# EAGLE board PROIECTUL TUL (EAGLE 9.7.0)
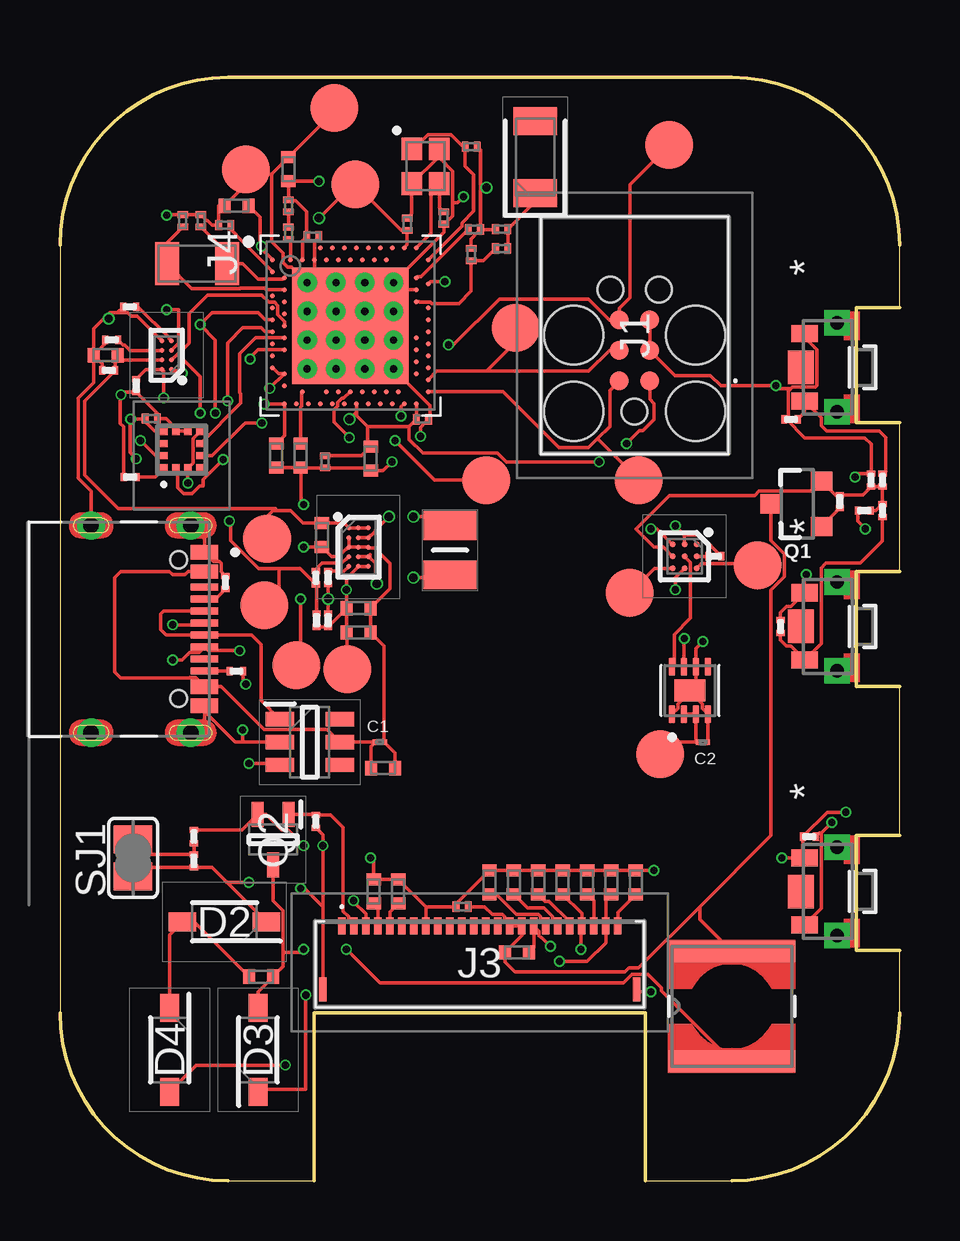
[diagram p0: board, top side]
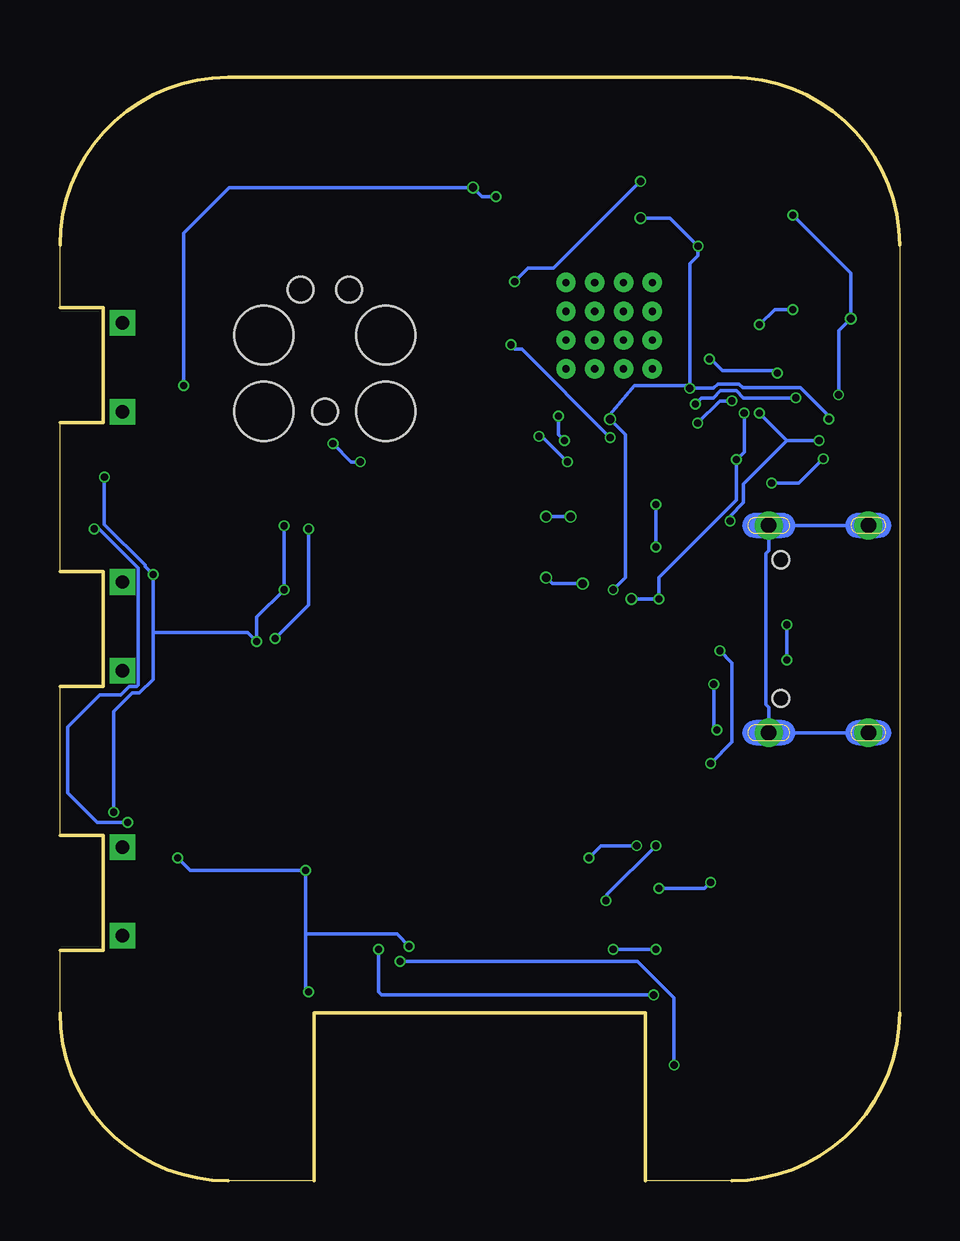
[diagram p1: board, bottom side, seen from below]

Size 35 x 46 mm. Coordinates in mm from the lower left corner, seen from the top.
Outline: 7,0 10.6,0 10.6,7 24.4,7 24.4,0 28,0 arc90 35,7 35,9.6 33.2,9.6 33.2,14.4 35,14.4 35,20.6 33.2,20.6 33.2,25.4 35,25.4 35,31.6 33.2,31.6 33.2,36.4 35,36.4 35,39 arc90 28,46 7,46 arc90 0,39 0,7 arc90 7,0
Copper layers (1*16): Top 0.035mm / dielectric 1.6mm / Bottom 0.035mm
Design rules "jlcpcb-2layers.dru": minimum track width 0.15mm, minimum drill 0.3mm, track to track 5mil, track to pad 0.05mm, pad to pad 5mil, via to via 5mil, smd to smd 5mil, copper to edge 0.2mm, drill to drill 0.1mm, minimum pad ring 10mil, minimum via ring 3mil, stop-mask expansion 4mil, vias tented up to drill 0mil, thermal gap 10mil

## Footprints (pad centres in the part's own frame; a part is rotated, then mirrored left to right if it is on the bottom)
2450AT18B100E_ANTC3216X140N = smd 1.15 x 1.8: 1 -1.5,0; 2 1.5,0
GRM011R60J152KE01L_2_CAPC0201X13N = smd 0.22 x 0.23: 1 -0.185,0; 2 0.185,0
GRM011R60J152KE01L_1_0201 = smd 0.35 x 0.25: 1 0,0.275; 2 0,-0.275
NORDIC_NRF_3_RESC0402_L = smd 0.5 x 0.6: 1 -0.5,0; 2 0.5,0
ESP32_C6_LIBRARY_3_SOT95P280X145-6N = smd 1.2 x 0.6: 1 -1.25,0.95; 2 -1.25,0; 3 -1.25,-0.95; 4 1.25,-0.95; 5 1.25,0; 6 1.25,0.95
ESP32_C6_LIBRARY_5_SOD3716X135N = smd 1.15 x 0.8: 1 -1.75,0; 2 1.75,0
NORDIC_NRF_3_RESC0201_L = smd 0.28 x 0.43: 1 -0.255,0; 2 0.255,0
RT6160AWSC_BGA15C40P3X5_140X230X60 = smd 0.216 x 0.216: A1 -0.4,0.8; A2 0,0.8; A3 0.4,0.8; B1 -0.4,0.4; B2 0,0.4; B3 0.4,0.4; C1 -0.4,0; C2 0,0; C3 0.4,0; D1 -0.4,-0.4; D2 0,-0.4; D3 0.4,-0.4; E1 -0.4,-0.8; E2 0,-0.8; E3 0.4,-0.8
DRV2605YZFR_BGA9C50P3X3_144X144X62 = smd 0.25 x 0.25: A1 -0.5,0.5; A2 0,0.5; A3 0.5,0.5; B1 -0.5,0; B2 0,0; B3 0.5,0; C1 -0.5,-0.5; C2 0,-0.5; C3 0.5,-0.5
BQ25180YBGR_BGA8C40P2X4_100X155X50 = smd 0.2 x 0.2: A1 -0.2,0.6; A2 0.2,0.6; B1 -0.2,0.2; B2 0.2,0.2; C1 -0.2,-0.2; C2 0.2,-0.2; D1 -0.2,-0.6; D2 0.2,-0.6
BMA423_BMA423 = smd 0.3 x 0.35: 1 -0.75,-0.775; 2 -0.25,-0.775; 3 0.25,-0.775; 4 0.75,-0.775; 7 0.75,0.775; 8 0.25,0.775; 9 -0.25,0.775; 10 -0.75,0.775 | smd 0.35 x 0.3: 5 0.775,-0.25; 6 0.775,0.25; 11 -0.775,0.25; 12 -0.775,-0.25
TC2030-IDC_TC2030IDC = smd 0.783 x 0.783: 1 -0.953,-0.635; 2 -0.953,0.635; 3 0.317,-0.635; 4 0.317,0.635; 5 1.588,-0.635; 6 1.588,0.635 | hole 2.451: -2.223,-2.54; -2.223,2.54; 0.952,-2.54; 0.952,2.54 | hole 1.067: -2.223,0; 2.857,-1.016; 2.857,1.016
503480-2400_5034802400 = smd 0.3 x 0.7: 1 -5.75,1.525; 2 -5.25,1.525; 3 -4.75,1.525; 4 -4.25,1.525; 5 -3.75,1.525; 6 -3.25,1.525; 7 -2.75,1.525; 8 -2.25,1.525; 9 -1.75,1.525; 10 -1.25,1.525; 11 -0.75,1.525; 12 -0.25,1.525; 13 0.25,1.525; 14 0.75,1.525; 15 1.25,1.525; 16 1.75,1.525; 17 2.25,1.525; 18 2.75,1.525; 19 3.25,1.525; 20 3.75,1.525; 21 4.25,1.525; 22 4.75,1.525; 23 5.25,1.525; 24 5.75,1.525 | smd 0.3 x 1: MP1 -6.54,-1.125; MP2 6.54,-1.125
KH-TYPE-C-16P_KINGHELM_KH-TYPE-C-16P = smd 0.6 x 1.15: A1_B12 -3.2,4.725; A4_B9 -2.4,4.725; A9_B4 2.4,4.725; A12_B1 3.2,4.725 | smd 0.3 x 1.15: A5 -1.25,4.725; A6 -0.25,4.725; A7 0.25,4.725; A8 1.25,4.725; B5 1.75,4.725; B6 0.75,4.725; B7 -0.75,4.725; B8 -1.75,4.725 | drill 0.65 pad 1.05: SH1 -4.32,0; SH2 4.32,0; SH3 -4.32,4.15; SH4 4.32,4.15 | hole 0.7: -2.89,3.65; 2.89,3.65
MLP2016SR47MT0S1_INDC2016X100N = smd 1.2 x 2.2: 1 -1.028,0; 2 1.028,0
ESP32_C6_LIBRARY_2_IND_4828-WE-TPC_WRE = smd 0.9 x 5.3: 1 -2.286,0; 2 2.286,0
ESP32_C6_LIBRARY_4_ESP32_C6_LIBRARY_4_ESP32_C6_LIBRARY_4_ESP32_C6_LIBRARY_4_ESP32_WROVER_SPARKFUN-DISCRETESEMI_SOT23-3 = smd 0.8 x 0.9: 1 -0.95,-1; 2 0.95,-1; 3 0,1.1
ESP32_C6_LIBRARY_6_SOT65P210X110-3N = smd 1.05 x 0.5: 1 -1.05,0.65; 2 -1.05,-0.65; 3 1.05,0
ERA-1AEB3401C_0201 = smd 0.35 x 0.25: 1 0,0.275; 2 0,-0.275
CPF0201D7K68C1_0201 = smd 0.35 x 0.25: 1 0,0.275; 2 0,-0.275
ESP32_C6_LIBRARY_7_JUMPER_SJ = smd 1.168 x 1.6: 1 -0.762,0; 2 0.762,0
2025-10-22_07-23-44_LIBRARY_SW_EVP-AKE31A_PAN = smd 0.711 x 1.092: 1 -1.4,-0.972; 2 1.4,-0.972 | drill 0.559 pad 0.914 square: 3 -1.848,0.381; 4 1.848,0.381 | smd 1.397 x 1.092: 5 0,-1.124
HECTOR_WATCH_1_TP20R = smd 2 x 2: TP 0,0
ESP32_C6_LIBRARY_SON50P200X200X80-9N = smd 0.76 x 0.27: 1 -0.985,0.75; 2 -0.985,0.25; 3 -0.985,-0.25; 4 -0.985,-0.75; 5 0.985,-0.75; 6 0.985,-0.25; 7 0.985,0.25; 8 0.985,0.75 | smd 0.9 x 1.3: 9 0,0
NORDIC_NRF_4_AQFN50P700X700X85_HS-74N = smd 4.85 x 4.85: P$74 0,0 | drill 0.3 pad 0.6: P$75 -1.8,1.8; P$76 -0.6,1.8; P$77 0.6,1.8; P$78 1.8,1.8; P$79 -1.8,0.6; P$80 -0.6,0.6; P$81 0.6,0.6; P$82 1.8,0.6; P$83 -1.8,-0.6; P$84 -0.6,-0.6; P$85 0.6,-0.6; P$86 1.8,-0.6; P$87 -1.8,-1.8; P$88 -0.6,-1.8; P$89 0.6,-1.8; P$90 1.8,-1.8 | smd 0.2 x 0.2: P$A8 -1.25,3.25; P$A10 -0.75,3.25; P$A12 -0.25,3.25; P$A14 0.25,3.25; P$A16 0.75,3.25; P$A18 1.25,3.25; P$A20 1.75,3.25; P$A22 2.25,3.25; P$A23 2.75,3.25; P$AA24 3.25,-2.25; P$AB2 -2.75,-2.5; P$AC5 -2,-2.75; P$AC9 -1,-2.75; P$AC11 -0.5,-2.75; P$AC13 0,-2.75; P$AC15 0.5,-2.75; P$AC17 1,-2.75; P$AC19 1.5,-2.75; P$AC21 2,-2.75; P$AC24 3.25,-2.75; P$AD2 -2.75,-3.25; P$AD4 -2.25,-3.25; P$AD6 -1.75,-3.25; P$AD8 -1.25,-3.25; P$AD10 -0.75,-3.25; P$AD12 -0.25,-3.25; P$AD14 0.25,-3.25; P$AD16 0.75,-3.25; P$AD18 1.25,-3.25; P$AD20 1.75,-3.25; P$AD22 2.25,-3.25; P$AD23 2.75,-3.25; P$B1 -3.25,2.75; P$B3 -2.5,2.75; P$B5 -2,2.75; P$B7 -1.5,2.75; P$B9 -1,2.75; P$B11 -0.5,2.75; P$B13 0,2.75; P$B15 0.5,2.75; P$B17 1,2.75; P$B19 1.5,2.75; P$B24 3.25,2.75; P$C1 -3.25,2.25; P$D2 -2.75,2; P$D23 2.75,2; P$E24 3.25,1.75; P$F2 -2.75,1.5; P$F23 2.75,1.5; P$G1 -3.25,1.25; P$H2 -2.75,1; P$H23 2.75,1; P$J1 -3.25,0.75; P$J24 3.25,0.75; P$K2 -2.75,0.5; P$L1 -3.25,0.25; P$L24 3.25,0.25; P$M2 -2.75,0; P$N1 -3.25,-0.25; P$N24 3.25,-0.25; P$P2 -2.75,-0.5; P$P23 2.75,-0.5; P$R1 -3.25,-0.75; P$R24 3.25,-0.75; P$T2 -2.75,-1; P$T23 2.75,-1; P$U1 -3.25,-1.25; P$U24 3.25,-1.25; P$V23 2.75,-1.5; P$W1 -3.25,-1.75; P$W24 3.25,-1.75; P$Y2 -2.75,-2; P$Y23 2.75,-2
RESC0201_L = smd 0.28 x 0.43: 1 -0.255,0; 2 0.255,0
NORDIC_NRF_1_XTAL_3215_N = smd 1 x 1.8: 1 -1.25,0; 2 1.25,0
NORDIC_NRF_2_RESC0201_L = smd 0.28 x 0.43: 1 -0.255,0; 2 0.255,0
NORDIC_NRF_BT-XTAL_2016_N = smd 0.95 x 0.85: 1 -0.725,-0.575; 2 0.725,-0.575; 3 0.725,0.575; 4 -0.725,0.575

## Placement (x,y rotation side)
ANT1  2450AT18B100E_2450AT18B100E  [2450AT18B100E_ANTC3216X140N]  19.81,42.67 90 top
C1  0.1uF  [GRM011R60J152KE01L_2_CAPC0201X13N]  13.34,18.29 0 top
C2  0.1uF  [GRM011R60J152KE01L_2_CAPC0201X13N]  26.8,18.29 180 top
C4  1uF  [GRM011R60J152KE01L_1_0201]  3.17,33.15 180 top
C5  1uF  [GRM011R60J152KE01L_1_0201]  2.16,35.05 90 top
C6  0.1uF  [GRM011R60J152KE01L_1_0201]  2.03,33.78 90 top
C7  1uF  [GRM011R60J152KE01L_1_0201]  27.3,26.04 270 top
C8  0.1uF  [GRM011R60J152KE01L_1_0201]  33.81,29.21 0 top
C9  1uF  [GRM011R60J152KE01L_1_0201]  30.04,23.11 0 top
C10  1uF  [GRM011R60J152KE01L_1_0201]  31.24,14.35 90 top
C11  1uF  [GRM011R60J152KE01L_1_0201]  30.48,31.75 90 top
C39  10uF  [NORDIC_NRF_3_RESC0402_L]  1.91,34.42 180 top
D1  ESP32_C6_LIBRARY_3_USBLC6-2SC6Y  [ESP32_C6_LIBRARY_3_SOT95P280X145-6N]  10.41,18.29 0 top
D2  MBR0530  [ESP32_C6_LIBRARY_5_SOD3716X135N]  6.86,10.79 180 top
D3  MBR0530  [ESP32_C6_LIBRARY_5_SOD3716X135N]  8.26,5.46 90 top
D4  MBR0530  [ESP32_C6_LIBRARY_5_SOD3716X135N]  4.57,5.46 270 top
EPD_C1  1uF/50V  [NORDIC_NRF_3_RESC0402_L]  14.1,12.06 270 top
EPD_C2  1uF/50V  [NORDIC_NRF_3_RESC0402_L]  13.08,12.06 270 top
EPD_C5  0.1uF/50V  [NORDIC_NRF_3_RESC0201_L]  16.76,11.43 0 top
EPD_C6  1uF/50V  [NORDIC_NRF_3_RESC0402_L]  17.91,12.45 270 top
EPD_C7  1uF/50V  [NORDIC_NRF_3_RESC0402_L]  18.92,12.45 270 top
EPD_C8  1uF/50V  [NORDIC_NRF_3_RESC0402_L]  19.94,12.45 270 top
EPD_C9  1uF/50V  [NORDIC_NRF_3_RESC0402_L]  20.95,12.45 270 top
EPD_C10  1uF/50V  [NORDIC_NRF_3_RESC0402_L]  21.97,12.45 270 top
EPD_C11  1uF/50V  [NORDIC_NRF_3_RESC0402_L]  22.99,12.45 270 top
EPD_C12  1uF/50V  [NORDIC_NRF_3_RESC0402_L]  24,12.45 270 top
IC1  RT6160AWSC  [RT6160AWSC_BGA15C40P3X5_140X230X60]  12.45,26.42 0 top
IC2  DRV2605YZFR_DRV2605YZFR  [DRV2605YZFR_BGA9C50P3X3_144X144X62]  26.04,26.04 270 top
IC3  BQ25180YBGR_BQ25180YBGR  [BQ25180YBGR_BGA8C40P2X4_100X155X50]  4.45,34.42 180 top
IC4  BMA423_BMA423  [BMA423_BMA423]  5.08,30.48 0 top
J1  TC2030-IDC_TC2030-IDC  [TC2030-IDC_TC2030IDC]  23.96,34.3 90 top
J3  503480-2400_503480-2400  [503480-2400_5034802400]  17.5,9.1 0 top
J4  KH-TYPE-C-16P_KH-TYPE-C-16P  [KH-TYPE-C-16P_KINGHELM_KH-TYPE-C-16P]  1.3,23 270 top
L1  MLP2016SR47MT0S1_FTC252012SR47MBCA  [MLP2016SR47MT0S1_INDC2016X100N]  16.26,26.29 270 top
L2  68uH  [ESP32_C6_LIBRARY_2_IND_4828-WE-TPC_WRE]  28,7.27 90 top
Q1  20V/4.2A/52mΩ/1.4W  [ESP32_C6_LIBRARY_4_ESP32_C6_LIBRARY_4_ESP32_C6_LIBRARY_4_ESP32_C6_LIBRARY_4_ESP32_WROVER_SPARKFUN-DISCRETESEMI_SOT23-3]  30.74,28.22 90 top
Q2  SI1308EDL-T1-GE3  [ESP32_C6_LIBRARY_6_SOT65P210X110-3N]  8.89,14.22 270 top
R1  10k  [ERA-1AEB3401C_0201]  34.29,29.21 0 top
R2  10k  [CPF0201D7K68C1_0201]  33.53,27.94 90 top
R3  10k  [ERA-1AEB3401C_0201]  34.29,27.94 180 top
R4  10k  [ERA-1AEB3401C_0201]  2.9,36.43 90 top
R5  0  [CPF0201D7K68C1_0201]  10.67,25.14 0 top
R6  0  [ERA-1AEB3401C_0201]  11.18,25.15 0 top
R7  3k3  [ERA-1AEB3401C_0201]  11.18,23.37 180 top
R8  3k3  [ERA-1AEB3401C_0201]  10.7,23.37 180 top
R9  0  [ERA-1AEB3401C_0201]  2.92,29.34 270 top
R10  0.47  [ERA-1AEB3401C_0201]  5.59,14.35 180 top
R11  2.2  [ERA-1AEB3401C_0201]  5.59,13.34 180 top
R12  10k  [ERA-1AEB3401C_0201]  10.67,14.99 180 top
R13  5k1  [ERA-1AEB3401C_0201]  7.36,21.25 90 top
R14  5k1  [ERA-1AEB3401C_0201]  6.9,24.94 0 top
R_PWR_EPD  10k  [ERA-1AEB3401C_0201]  32.51,28.32 180 top
SJ1  [ESP32_C6_LIBRARY_7_JUMPER_SJ]  3.05,13.46 90 top
SW1  2025-10-22_07-23-44_LIBRARY_EVP-AKE31ASW_EVP-AKE31A_PAN  [2025-10-22_07-23-44_LIBRARY_SW_EVP-AKE31A_PAN]  32.01,33.91 270 top
SW2  2025-10-22_07-23-44_LIBRARY_EVP-AKE31ASW_EVP-AKE31A_PAN  [2025-10-22_07-23-44_LIBRARY_SW_EVP-AKE31A_PAN]  32.01,12.06 270 top
SW3  2025-10-22_07-23-44_LIBRARY_EVP-AKE31ASW_EVP-AKE31A_PAN  [2025-10-22_07-23-44_LIBRARY_SW_EVP-AKE31A_PAN]  32.01,23.11 270 top
TP_3.3V  HECTOR_WATCH_1_TPTP20R  [HECTOR_WATCH_1_TP20R]  12.32,41.53 0 top
TP_3V3  HECTOR_WATCH_1_TPTP20R  [HECTOR_WATCH_1_TP20R]  11.98,21.34 0 top
TP_BAT_GND  HECTOR_WATCH_1_TPTP20R  [HECTOR_WATCH_1_TP20R]  11.43,44.72 0 top
TP_GND  HECTOR_WATCH_1_TPTP20R  [HECTOR_WATCH_1_TP20R]  7.75,42.16 0 top
TP_ON  HECTOR_WATCH_1_TPTP20R  [HECTOR_WATCH_1_TP20R]  23.75,24.51 270 top
TP_OP  HECTOR_WATCH_1_TPTP20R  [HECTOR_WATCH_1_TP20R]  29.08,25.65 270 top
TP_RESET  HECTOR_WATCH_1_TPTP20R  [HECTOR_WATCH_1_TP20R]  25.4,43.18 270 top
TP_SCL  HECTOR_WATCH_1_TPTP20R  [HECTOR_WATCH_1_TP20R]  8.51,24 0 top
TP_SDA  HECTOR_WATCH_1_TPTP20R  [HECTOR_WATCH_1_TP20R]  9.85,21.5 0 top
TP_SWDCLK  HECTOR_WATCH_1_TPTP20R  [HECTOR_WATCH_1_TP20R]  18.99,35.56 0 top
TP_SWDIO  HECTOR_WATCH_1_TPTP20R  [HECTOR_WATCH_1_TP20R]  24.13,29.21 0 top
TP_SWO  HECTOR_WATCH_1_TPTP20R  [HECTOR_WATCH_1_TP20R]  17.78,29.21 0 top
TP_VBAT  HECTOR_WATCH_1_TPTP20R  [HECTOR_WATCH_1_TP20R]  25.02,17.78 270 top
TP_VREG  HECTOR_WATCH_1_TPTP20R  [HECTOR_WATCH_1_TP20R]  8.64,26.77 0 top
U1  ESP32_C6_LIBRARY_MAX17048G+T10  [ESP32_C6_LIBRARY_SON50P200X200X80-9N]  26.26,20.44 90 top
U$1  NORDIC_NRF_4_NRF52840_QF  [NORDIC_NRF_4_AQFN50P700X700X85_HS-74N]  12.11,35.65 0 top
U$2  100nF  [RESC0201_L]  6.87,39.84 0 top
U$4  100nF  [NORDIC_NRF_3_RESC0201_L]  11.05,29.97 270 top
U$5  12pF  [RESC0201_L]  5.12,40.02 270 top
U$6  12pF  [RESC0201_L]  5.88,40.02 270 top
U$8  47nF  [RESC0201_L]  10.54,39.37 180 top
U$10  100nF  [RESC0201_L]  14.48,39.88 270 top
U$11  [NORDIC_NRF_1_XTAL_3215_N]  5.71,38.23 0 top
U$12  [NORDIC_NRF_2_RESC0201_L]  18.41,38.86 0 top
U$13  1pF  [NORDIC_NRF_3_RESC0201_L]  17.14,38.61 90 top
U$15  32MHz  [NORDIC_NRF_BT-XTAL_2016_N]  15.24,42.29 270 top
U$16  12pF  [NORDIC_NRF_3_RESC0201_L]  16,40.13 270 top
U$17  12pF  [NORDIC_NRF_3_RESC0201_L]  17.14,43.11 0 top
U$18  100pF  [NORDIC_NRF_3_RESC0201_L]  17.27,39.66 180 top
U$19  10μH  [NORDIC_NRF_2_RESC0201_L]  9.53,39.5 90 top
U$20  15nH  [NORDIC_NRF_2_RESC0201_L]  9.53,40.64 90 top
U$21  1pF  [NORDIC_NRF_3_RESC0201_L]  18.41,39.67 180 top
U$22  100nF  [NORDIC_NRF_3_RESC0201_L]  15.11,31.75 0 top
U$23  4.7μF  [NORDIC_NRF_3_RESC0402_L]  9.02,30.23 270 top
U$24  4.7μF  [NORDIC_NRF_3_RESC0402_L]  12.95,30.1 270 top
U$25  4.7μF  [NORDIC_NRF_3_RESC0402_L]  7.37,40.64 0 top
U$26  1μF  [NORDIC_NRF_3_RESC0402_L]  9.53,42.16 90 top
U$27  4.7μF  [NORDIC_NRF_3_RESC0402_L]  10.03,30.23 270 top
U$28  10uF  [NORDIC_NRF_3_RESC0402_L]  10.92,26.92 90 top
U$29  22uF  [NORDIC_NRF_3_RESC0402_L]  12.45,22.86 0 top
U$30  22uF  [NORDIC_NRF_3_RESC0402_L]  12.45,23.88 0 top
U$31  100nF  [NORDIC_NRF_3_RESC0201_L]  3.81,31.77 0 top
U$34  4.7uF  [NORDIC_NRF_3_RESC0402_L]  13.46,17.2 0 top
U$36  10uF  [NORDIC_NRF_3_RESC0402_L]  19.05,9.53 0 top
U$37  4.7uF/25V  [NORDIC_NRF_3_RESC0402_L]  8.38,8.51 0 top

## Library data of the parts
ANT1 = InkTime_v5; ARROW_PART_NUMBER: 2450AT18B100E; ARROW_PRICE-STOCK: https://www.arrow.com/en/products/2450at18b100e/johanson-dielectrics?utm_currency=USD&region=nac; DESCRIPTION: Antennas 2.45GHz ANTENNA; HEIGHT: 1.4mm; MANUFACTURER_NAME: JOHANSON TECHNOLOGY; MANUFACTURER_PART_NUMBER: 2450AT18B100E; MOUSER_PART_NUMBER: 609-2450AT18B100E; MOUSER_PRICE-STOCK: https://www.mouser.co.uk/ProductDetail/Johanson-Technology/2450AT18B100E?qs=yCnrNFeXz%252Bh5MFsFIXGZGA%3D%3D
C1 C2 = InkTime_v5; AVAILABILITY: In Stock; CHECK_PRICES: https://www.snapeda.com/parts/GRM011R60J152KE01L/Murata/view-part/?ref=eda; DESCRIPTION: SMD Capacitor X5R(EIA) with Capacitance: 1500pF Tol. 10%. Rated Voltage: 6.3Vdc; MF: Murata; MP: GRM011R60J152KE01L; PACKAGE: 0201 Murata; PRICE: None; SNAPEDA_LINK: https://www.snapeda.com/parts/GRM011R60J152KE01L/Murata/view-part/?ref=snap
C4-C11 C39 EPD_C1 EPD_C2 EPD_C5-EPD_C12 R1-R14 R_PWR_EPD SJ1 TP_3.3V TP_3V3 TP_BAT_GND TP_GND TP_ON TP_OP TP_RESET TP_SCL TP_SDA TP_SWDCLK TP_SWDIO TP_SWO TP_VBAT TP_VREG U$1 U$4 U$11-U$13 U$15-U$31 U$34 U$36 U$37 = InkTime_v5
D1 = InkTime_v5; AVAILABILITY: In Stock; CHECK_PRICES: https://www.snapeda.com/parts/USBLC6-2SC6Y/STMicroelectronics/view-part/?ref=eda; DESCRIPTION: 17V Clamp 5A (8/20µs) Ipp Tvs Diode Surface Mount SOT-23-6; MF: STMicroelectronics; MP: USBLC6-2SC6Y; PACKAGE: SOT-23-6 STMicroelectronics; PRICE: None; SNAPEDA_LINK: https://www.snapeda.com/parts/USBLC6-2SC6Y/STMicroelectronics/view-part/?ref=snap
D2-D4 = InkTime_v5; AVAILABILITY: In Stock; CHECK_PRICES: https://www.snapeda.com/parts/MBR0530/Onsemi/view-part/?ref=eda; DESCRIPTION: Diode Schottky 30 V 500mA Surface Mount SOD-123; MF: ON Semiconductor; MP: MBR0530; PACKAGE: SOD-123-2 ON Semiconductor; PRICE: None; PURCHASE-URL: https://www.snapeda.com/api/url_track_click_mouser/?unipart_id=179458&manufacturer=ON Semiconductor&part_name=MBR0530&search_term=None; SNAPEDA_LINK: https://www.snapeda.com/parts/MBR0530/Onsemi/view-part/?ref=snap
IC1 = InkTime_v5; DESCRIPTION: Buck-Boost Regulator Positive Output Step-Up/Step-Down I2C DC-DC Controller IC 15-WL-CSP (BSC) (1.4x2.3); HEIGHT: 0.6mm; MANUFACTURER_NAME: RICHTEK; MANUFACTURER_PART_NUMBER: RT6160AWSC; MOUSER_PART_NUMBER: 835-RT6160AWSC; MOUSER_PRICE-STOCK: https://www.mouser.co.uk/ProductDetail/Richtek/RT6160AWSC?qs=amGC7iS6iy%2FLd9PSoixZXQ%3D%3D
IC2 = InkTime_v5; ARROW_PART_NUMBER: DRV2605YZFR; ARROW_PRICE-STOCK: https://www.arrow.com/en/products/drv2605yzfr/texas-instruments?region=nac; DESCRIPTION: Haptic Driver for ERM/LRA with Built-In Library and Smart Loop Architecture; HEIGHT: 0.625mm; MANUFACTURER_NAME: Texas Instruments; MANUFACTURER_PART_NUMBER: DRV2605YZFR
IC3 = InkTime_v5; ARROW_PART_NUMBER: BQ25180YBGR; ARROW_PRICE-STOCK: https://www.arrow.com/en/products/bq25180ybgr/texas-instruments?utm_currency=USD&region=nac; DESCRIPTION: Charger IC Lithium Ion/Polymer, Lithium Iron Phosphate 8-DSBGA (1.6x1.1); HEIGHT: 0.5mm; MANUFACTURER_NAME: Texas Instruments; MANUFACTURER_PART_NUMBER: BQ25180YBGR; MOUSER_PART_NUMBER: 595-BQ25180YBGR; MOUSER_PRICE-STOCK: https://www.mouser.co.uk/ProductDetail/Texas-Instruments/BQ25180YBGR?qs=doiCPypUmgEWjAK%252BJAX6Tw%3D%3D
IC4 = InkTime_v5; ARROW_PART_NUMBER: BMA423; ARROW_PRICE-STOCK: https://www.arrow.com/en/products/bma423/bosch; DESCRIPTION: Accelerometers Triaxial low-g 12bit Acceleration Sensor; HEIGHT: 1mm; MANUFACTURER_NAME: BOSCH; MANUFACTURER_PART_NUMBER: BMA423; MOUSER_PART_NUMBER: 262-BMA423; MOUSER_PRICE-STOCK: https://www.mouser.co.uk/ProductDetail/Bosch-Sensortec/BMA423?qs=HXFqYaX1Q2xC%252BSgeGoX3mg%3D%3D
J1 = InkTime_v5; DESCRIPTION: CABLE ADAPTER 6 POS; HEIGHT: 19mm; MANUFACTURER_NAME: Tag Connect; MANUFACTURER_PART_NUMBER: TC2030-IDC
J3 = InkTime_v5; DESCRIPTION: FFC & FPC Connectors 0.5mm FPC RA SMT Dual Contact 24Ckt; HEIGHT: 1.87mm; MANUFACTURER_NAME: Molex; MANUFACTURER_PART_NUMBER: 503480-2400; MOUSER_PART_NUMBER: 538-503480-2400; MOUSER_PRICE-STOCK: https://www.mouser.co.uk/ProductDetail/Molex/503480-2400?qs=OAhjpuo3Vu7efIoxFh9AOw%3D%3D
J4 = InkTime_v5; AVAILABILITY: Not in stock; CHECK_PRICES: https://www.snapeda.com/parts/KH-TYPE-C-16P/Kinghelm/view-part/?ref=eda; MF: kinghelm; MP: KH-TYPE-C-16P; PACKAGE: None; PRICE: None; SNAPEDA_LINK: https://www.snapeda.com/parts/KH-TYPE-C-16P/Kinghelm/view-part/?ref=snap
L1 = InkTime_v5; DESCRIPTION: SMD / SMT Inductors (Coils), L=0.47?H, L x W x T :; HEIGHT: 1mm; JLCPCB: https://jlcpcb.com/partdetail/6763488-FTC252012SR47MBCA/C5832368; MANUFACTURER_NAME: TDK; MANUFACTURER_PART_NUMBER: FTC252012SR47MBCA
L2 = InkTime_v5; COPYRIGHT: Copyright (C) 2024 Ultra Librarian. All rights reserved.; MANUFACTURER_PART_NUMBER: 744043680; MFR_NAME: Wurth Electronics
Q1 = InkTime_v5; PROD_ID: TRAN-14388
Q2 = InkTime_v5; AVAILABILITY: In Stock; CHECK_PRICES: https://www.snapeda.com/parts/SI1308EDL-T1-GE3/Vishay+Siliconix/view-part/?ref=eda; DESCRIPTION: Si1308EDL-T1-GE3 N-channel MOSFET Transistor, 1.5 A, 30 V, 3-Pin SC-70 | Siliconix / Vishay SI1308EDL-T1-GE3; MF: Vishay Siliconix; MP: SI1308EDL-T1-GE3; PACKAGE: SOT-323 Vishay Semiconductor; PRICE: None; PURCHASE-URL: https://www.snapeda.com/api/url_track_click_mouser/?unipart_id=274603&manufacturer=Vishay Siliconix&part_name=SI1308EDL-T1-GE3&search_term=None; SNAPEDA_LINK: https://www.snapeda.com/parts/SI1308EDL-T1-GE3/Vishay+Siliconix/view-part/?ref=snap
SW1-SW3 = InkTime_v5; COPYRIGHT: Copyright (C) 2025 Ultra Librarian. All rights reserved.; DIGI-KEY_PART_NUMBER_1: P123437TR-ND; DIGI-KEY_PART_NUMBER_2: P123437CT-ND; DIGI-KEY_PART_NUMBER_3: P123437DKR-ND; MANUFACTURER_NAME: Panasonic; MANUFACTURER_PART_NUMBER: EVP-AKE31A
U1 = InkTime_v5; AVAILABILITY: In Stock; CHECK_PRICES: https://www.snapeda.com/parts/MAX17048G+T10/Analog+Devices/view-part/?ref=eda; DESCRIPTION: 3µA 1-Cell/2-Cell Fuel Gauge with ModelGauge; MF: Analog Devices; MP: MAX17048G+T10; PACKAGE: TDFN-8 Maxim; PRICE: None; PURCHASE-URL: https://www.snapeda.com/api/url_track_click_mouser/?unipart_id=329239&manufacturer=Analog Devices&part_name=MAX17048G+T10&search_term=None; SNAPEDA_LINK: https://www.snapeda.com/parts/MAX17048G+T10/Analog+Devices/view-part/?ref=snap
U$2 U$5 U$6 U$8 U$10 = Nordic_nRF

## Nets
3V3/1.7D: C8.2 IC2.C2 Q1.2 R1.2 R2.2 R3.2 R_PWR_EPD.2
3V3/2.4A: IC1.E2 IC1.E3 IC4.3 IC4.7 IC4.10 J1.1 R7.1 R8.1 TP_3.3V.TP TP_3V3.TP U$1.P$A22 U$1.P$AD14 U$1.P$AD23 U$1.P$B1 U$1.P$W1 U$1.P$Y2 U$4.1 U$10.2 U$22.1 U$24.1 U$25.2 U$29.1 U$30.1 U$31.1
ALERT/1.6C: U1.5
ALERT/2.5C: U$1.P$J24
D+/1.5D: D1.4
D+/2.7D: U$1.P$AD6
D-/1.5D: D1.6
D-/2.7D: U$1.P$AD4
DN: D1.1 J4.A7 J4.B7
DP: D1.3 J4.A6 J4.B6
EPD_3V3: EPD_C5.2 J3.15 J3.16 L2.2 Q1.3 U$36.1
EPD_BUSY/1.5D: J3.9
EPD_BUSY/2.2D: U$1.P$AD12
EPD_CS/1.4C: J3.12
EPD_CS/2.2D: U$1.P$K2
EPD_DC/1.5D: J3.11
EPD_DC/2.2D: U$1.P$AD10
EPD_RST/1.5D: J3.10
EPD_RST/2.2D: U$1.P$AC11
GDR: J3.2 Q2.1 R12.2
GND: C1.2 C2.1 C4.1 C5.1 C6.1 C7.1 C8.1 C9.1 C10.1 C11.1 C39.2 D1.2 D2.1 EPD_C1.1 EPD_C2.1 EPD_C5.1 EPD_C6.1 EPD_C7.1 EPD_C8.1 EPD_C9.1 EPD_C10.1 EPD_C11.1 EPD_C12.1 IC1.B1 IC1.C1 IC1.C2 IC1.C3 IC2.B1 IC2.B3 IC3.D2 IC4.8 IC4.9 J1.3 J1.5 J3.8 J3.17 J3.MP1 J3.MP2 J4.A1_B12 J4.A12_B1 J4.SH1 J4.SH2 J4.SH3 J4.SH4 R4.1 R9.2 R11.1 R12.1 R13.2 R14.1 SJ1.1 SW1.1 SW2.1 SW3.1 TP_BAT_GND.TP TP_GND.TP U1.1 U1.4 U1.6 U1.9 U$1.P$74 U$1.P$75 U$1.P$76 U$1.P$77 U$1.P$78 U$1.P$79 U$1.P$80 U$1.P$81 U$1.P$82 U$1.P$83 U$1.P$84 U$1.P$85 U$1.P$86 U$1.P$87 U$1.P$88 U$1.P$89 U$1.P$90 U$1.P$B7 U$1.P$F23 U$2.1 U$4.2 U$5.1 U$6.1 U$8.1 U$10.1 U$13.2 U$15.2 U$15.4 U$16.2 U$17.2 U$18.1 U$21.2 U$22.2 U$23.2 U$24.2 U$25.1 U$26.2 U$27.2 U$28.1 U$29.2 U$30.2 U$31.2 U$34.2 U$36.2
HAPTIC_EN/1.4C: IC2.A1
HAPTIC_EN/2.6A: U$1.P$U1
IMU_INT1: IC4.5 U$1.P$N1
IMU_INT2: IC4.6 U$1.P$P2
LX1: IC1.B2 IC1.B3 L1.1
LX2: IC1.D2 IC1.D3 L1.2
MOSI/1.5B: J3.14
MOSI/2.2D: U$1.P$B13
N$1: U$1.P$D2 U$6.2 U$11.2
N$2: U$1.P$F2 U$5.2 U$11.1
N$3: U$1.P$H23 U$12.1 U$13.1
N$4: U$1.P$B3 U$19.1
N$5: U$1.P$B5 U$1.P$E24 U$8.2 U$20.2 U$26.1
N$6: IC1.E1 R6.1
N$7: U$1.P$D23 U$18.2
N$8: U$1.P$A23 U$15.3 U$16.1
N$9: U$1.P$B24 U$15.1 U$17.1
N$10: U$19.2 U$20.1
N$11: ANT1.1 U$12.2 U$21.1
N$12: U$1.P$AC5 U$27.1
N$14: IC1.D1 R5.1
N$15: IC4.1 R9.1
N$17: EPD_C2.2 J3.4
N$18: IC3.D1 R4.2
N$19: EPD_C1.2 J3.5
N$20: EPD_C7.2 J3.19
N$21: C7.2 IC2.A2
N$22: EPD_C6.2 J3.18
N$23: EPD_C8.2 J3.20
N$25: EPD_C12.2 J3.24
N$26: D2.2 D4.1 U$37.1
N$27: EPD_C10.2 J3.22
N$28: J4.A5 R14.2
N$29: J4.B5 R13.1
N$30: D3.2 L2.1 Q2.3 U$37.2
N$31: R10.1 R11.2 SJ1.2
NC: U$1.P$A18
NC2: U$1.P$N24
OUT+: IC2.A3 TP_OP.TP
OUT-: IC2.C3 TP_ON.TP
P0.04: U$1.P$J1
P0.09: U$1.P$L24
P0.13/1.5D: C11.2 R1.1 SW1.2
P0.13/2.6C: U$1.P$AD8
P0.14/1.5D: C10.2 R2.1 SW2.2
P0.14/2.7C: U$1.P$AC9
P0.19: U$1.P$AC15
P0.20: U$1.P$AD16
P0.21: U$1.P$AC17
P0.22: U$1.P$AD18
P0.23: U$1.P$AC19
P0.24: U$1.P$AD20
P0.25: U$1.P$AC21
P0.26: U$1.P$G1
P0.27: U$1.P$H2
P0.28: U$1.P$B11
P0.29: U$1.P$A10
P0.30: U$1.P$B9
P0.31: U$1.P$A8
P1.01/1.6C: Q1.1 R_PWR_EPD.1
P1.01/2.4B: U$1.P$Y23
P1.02/1.6C: C9.2 R3.1 SW3.2
P1.02/2.8C: U$1.P$W24
P1.03: U$1.P$V23
P1.04: U$1.P$U24
P1.05: U$1.P$T23
P1.06: U$1.P$R24
P1.07: U$1.P$P23
P1.09: U$1.P$R1
P1.10: U$1.P$A20
P1.11: U$1.P$B19
P1.12: U$1.P$B17
P1.13: U$1.P$A16
P1.14: U$1.P$B15
P1.15: U$1.P$A14
PMIC_INT: IC3.A1 U$1.P$T2
PREVGH: D3.1 EPD_C9.2 J3.21
PREVGL: D4.2 EPD_C11.2 J3.23
RESE: J3.3 Q2.2 R10.2
RESET: J1.6 TP_RESET.TP U$1.P$AC13
SASSS: U$1.P$C1 U$2.2
SCK/1.5B: J3.13
SCK/2.2D: U$1.P$A12
SCL/1.4C: IC2.C1 U1.7
SCL/2.4C: IC3.B1 IC4.12 R5.2 R8.2 TP_SCL.TP U$1.P$M2
SDA/1.4C: IC2.B2 U1.8
SDA/2.4C: IC3.C1 IC4.2 R6.2 R7.2 TP_SDA.TP U$1.P$L1
SWDCLK: J1.4 TP_SWDCLK.TP U$1.P$AA24
SWDIO: J1.2 TP_SWDIO.TP U$1.P$AC24
SWO: TP_SWO.TP U$1.P$AD22
VBAT/1.2A: C2.2 TP_VBAT.TP U1.2 U1.3
VBAT/2.5C: C5.2 IC3.C2
VBUS/1.5D: C1.1 D1.5 J4.A4_B9 J4.A9_B4 U$34.1
VBUS/2.6D: C4.2 IC3.A2 U$1.P$AD2 U$23.1
VREG: C6.2 C39.1 IC1.A1 IC1.A2 IC1.A3 IC3.B2 TP_VREG.TP U$28.2

## Tracks (layer width: path | path; a pad name or v marks a point on that pad's centre or on a via)
3V3/1.7D
  Top 0.152: IC2.C2 25.15,26.42 24.76,26.42 24,27.18 25.4,28.57 28.97,28.57 29.14,28.75 31.32,28.75 Q1.2 32.32,28.6 R_PWR_EPD.2 33.47,28.6 C8.2 R1.2 R3.2 34.02,27.94 R2.2
3V3/2.4A  (via drill 0.3, 0.35)
  Top 0.15: 8.34,40.16 U$25.2 | U$1.P$AD23 U$22.1 14.56,31.45 | 14.56,31.45 12.82,31.45 12.39,31.88 | J1.1 24.59,32.58 24.77,32.41 24.77,31.74 24.29,31.27 24.15,31.27 v23.62,30.73 | v22.48,29.97 18.61,29.97 18.25,30.34 15.13,30.34 14.56,30.91 14.56,31.45
  Top 0.152: U$4.1 12.58,30.23 U$24.1 12.82,30.73 12.82,31.45 | IC1.E3 IC1.E2 11.94,25.11 v11.94,24.64 11.94,23.88 U$30.1 | TP_3V3.TP 11.98,22.83 U$29.1 U$30.1 | U$1.P$B1 8.34,38.91 | 8.34,38.91 8.34,40.16 | U$1.P$A22 14.48,39.02 U$10.2 14.22,39.62 TP_3.3V.TP 12.19,41.53 v10.79,40.13 | IC4.10 3.94,31.25 3.56,31.64 U$31.1 3.53,31.75 v2.95,31.75 2.92,31.73 2.92,30.35 v3.17,30.1 | v8.75,33.04 U$1.P$Y2 9.11,33.65 U$1.P$W1 | 8.34,38.91 v8.4,38.96 | U$30.1 11.95,23.86 R7.1 R8.1 | v12.06,31.75 12.36,32.04 U$1.P$AD14 12.36,31.91 12.39,31.88 | IC4.7 5.83,31.21 5.55,30.93 5.55,29.93 IC4.3 v5.33,29.09 v5.33,29.08
  Bottom 0.15: v8.75,33.04 8.75,33.15 8.75,38.23 8.4,38.58 v8.4,38.96 | v23.62,30.73 22.86,29.97 v22.48,29.97
  Bottom 0.152: 8.75,33.15 11.05,33.15 12.06,31.95 v12.06,31.75 11.43,31.11 11.43,25.15 v11.94,24.64 | v10.79,40.13 9.57,40.13 v8.4,38.96 | v8.75,33.04 7.76,33.04 7.57,33.22 6.69,33.22 6.54,33.07 4.14,33.07 2.95,31.88 v2.95,31.75 | v5.33,29.08 4.19,29.08 v3.17,30.1
DN
  Top 0.15: J4.B7 4.32,23.75 4.19,23.62 4.19,22.99 4.43,22.75 J4.A7
  Top 0.152: D1.1 8.38,20.02 8.38,22.35 7.98,22.75 J4.A7
DP  (via drill 0.3)
  Top 0.15: J4.B6 5.8,22.02 5.4,22.02 5.09,21.72 v4.7,21.72 | J4.A6 5.95,23.18 v4.7,23.18
  Top 0.152: D1.3 9.1,17.4 v7.87,17.4 | v7.49,22.1 6.18,22.1 J4.B6
  Bottom 0.15: v4.7,23.18 v4.7,21.72
  Bottom 0.152: v7.49,22.1 6.99,21.59 6.99,18.29 v7.87,17.4
EPD_3V3
  Top 0.15: Q1.3 29.64,26.69 30.21,26.12 30.21,25.19 29.64,24.62 29.64,14.4 26.67,11.43 | U$36.1 18.55,9.14 18.97,8.72 23.56,8.72 23.72,8.88 24.12,8.88 26.67,11.43 | 26.67,11.43 26.67,10.89 L2.2
  Top 0.152: EPD_C5.2 17.7,11.43 18.02,11.1 18.45,11.1 18.53,11.03 18.53,10.85 J3.15 J3.16 19.25,10.22 U$36.1
GDR
  Top 0.15: J3.2 12.03,10.85 12.03,11.03 11.81,11.24 11.81,14.73 11.28,15.26 R12.2
  Top 0.152: Q2.1 10.65,15.27 R12.2
GND  (via drill 0.3, 0.35)
  Top 0.15: U$1.P$75 10.61,37.75 U$1.P$B7 10.61,39.18 U$8.1 | U$1.P$F23 14.21,37.15 U$1.P$78 | J4.A12_B1 6.03,19.56 | 6.03,19.56 6.03,19.25 J4.SH4 | U$15.4 15.81,42.72 U$15.2 14.66,40.32 U$10.1 | U$21.2 18.14,39.66 U$18.1 | C39.2 1.41,33.27 0.76,32.63 0.76,29.3 1.3,28.75 J4.SH1 | R14.1 6.72,25.39 6.72,25.75 6.65,25.82 6.4,25.82 J4.A1_B12 6.03,26.75 J4.SH3 | D1.2 7.62,18.29 7.29,18.29 6.03,19.56 | U$29.2 13.52,22.29 C1.2 13.96,17.85 U$34.2 | v25.65,27.3 26.04,26.92 IC2.B1 | v26.8,22.48 26.52,22.2 26.52,20.95 | R12.1 10.96,14.42 v10.96,13.97 10.96,11.43 | 10.96,11.43 10.96,10.82 | 10.96,11.43 10.2,12.19 v10.03,12.19 | v7.87,12.45 6.96,12.45 6.84,12.56 | v12.95,13.46 13.08,13.34 EPD_C2.1 | v24.77,12.95 24.13,12.95 EPD_C12.1
  Top 0.152: 2.39,36.19 2.07,36.19 1.99,36.11 | IC3.D2 3.21,36.05 2.97,36.05 2.83,36.19 2.39,36.19 | 1.99,36.11 1.41,35.52 C39.2 | IC1.C1 IC1.C2 IC1.C3 12.88,26.38 13.12,26.38 13.77,25.73 13.77,24.7 U$30.2 U$29.2 | IC1.C1 IC1.B1 | IC1.C1 11.96,26.33 11.92,26.33 11.62,26.03 11.32,26.03 U$28.1 v10.17,26.42 v10.16,26.42 | IC4.8 IC4.9 4.83,31.37 4.42,31.77 U$31.2 4.07,31.98 C4.1 2.65,32.87 v2.54,32.77 2.52,32.74 2.52,31.57 2.65,31.45 R9.2 | 10.96,10.82 J3.MP1 | EPD_C2.1 EPD_C1.1 15.25,11.41 | 15.25,11.41 J3.8 | 15.25,11.41 15.27,11.43 EPD_C5.1 16.55,11.47 16.55,11.59 EPD_C6.1 EPD_C7.1 EPD_C8.1 EPD_C9.1 EPD_C10.1 EPD_C11.1 24.13,12.95 | 8.83,41.97 8.83,39.14 9.3,38.66 9.3,38.27 9.48,38.09 9.66,38.09 U$1.P$75 U$1.P$74 | v30.1,13.46 SW2.1 30.97,13.54 C10.1 31.98,15.37 v32.77,15.37 | v24.64,7.87 24.14,7.87 J3.MP2 | C5.1 1.88,34.9 C39.2 | C39.2 1.76,34.06 C6.1 | SW1.1 31.04,35.18 31.56,34.66 31.56,33.16 31.48,33.08 30.53,33.08 30.47,33.03 | 30.47,33.03 30.37,32.92 30.37,31.91 C11.1 30.28,31.75 31.06,30.97 33.55,30.97 33.81,30.7 C8.1 33.3,29.48 v33.15,29.34 | U$1.P$74 U$1.P$80 | U$1.P$74 U$1.P$81 | U$1.P$74 U$1.P$85 | 12.11,36.85 U$1.P$77 | U$1.P$74 12.11,36.85 | 12.11,36.85 U$1.P$76 | U$1.P$74 U$1.P$78 16,39.54 U$16.2 16.23,40.11 16.26,40.11 16.37,40.22 16.37,40.77 | 13.31,35.65 U$1.P$82 | U$1.P$74 13.31,35.65 | 13.31,35.65 U$1.P$86 | U$1.P$74 U$1.P$90 15.43,32.32 15.43,31.81 U$22.2 15.12,31.51 15.12,31.48 15.04,31.39 v15.04,31.04 | 12.11,34.45 U$1.P$89 | U$1.P$74 12.11,34.45 | 12.11,34.45 U$1.P$88 | U$1.P$74 U$1.P$87 | U$1.P$74 U$1.P$84 U$1.P$83 | U$1.P$74 10.91,35.65 U$1.P$79 | 8.83,41.97 U$26.2 11.43,44.57 TP_BAT_GND.TP
  Top 0.152: TP_GND.TP 7.75,42.04 | 7.75,42.04 7.75,41.52 U$25.1 6.62,40.64 U$2.1 6.34,39.84 6.15,40.03 6.12,40.03 U$6.1 U$5.1 4.46,40.27 v4.45,40.26 | 8.83,41.97 7.82,41.97 7.75,42.04 | J1.5 J1.3 25.63,33.58 27.12,33.58 27.55,33.15 v29.84,33.15 29.97,33.03 30.47,33.03 | 15.81,42.72 15.81,42.64 16.37,42.09 16.37,40.77 | U$17.2 17.53,42.98 17.53,41.27 | 17.53,41.27 U$18.1 17.28,39.41 17.28,39.39 17.14,39.25 U$13.2 | 16.37,40.77 16.56,40.77 v16.82,41.02 | v17.78,41.4 17.65,41.27 17.53,41.27 | C9.1 30.04,23.69 30.29,23.94 30.46,23.94 SW3.1 31.04,25.2 v31.11,25.27 | D2.1 6.84,12.56 6.34,13.06 R11.1 3.41,13.06 SJ1.1 | U$23.2 U$27.2 10.04,29.72 | 10.04,29.72 U$4.2 12.84,29.72 U$24.2 13.47,29.6 v13.84,29.97 | v10.16,28.19 10.04,28.31 10.04,29.72 | C2.1 27.02,18.32 U1.4 26.78,19.7 26.78,19.87 26.27,20.38 | U1.6 26.52,20.95 26.52,20.69 U1.9 26.27,20.38 | U1.1 25.75,19.7 25.75,19.87 26.27,20.38 | IC2.B3 25.65,25.15 v25.65,24.64 | R13.2 7.63,20.82 v7.75,20.7 | v7.62,18.8 7.62,18.29 | U$36.2 19.75,9.72 J3.17 19.97,10.4 19.97,10.22 20.05,10.15 20.08,10.15 v20.45,9.78 | R4.1 2.39,36.19 | v2.03,35.94 1.99,35.98 1.99,36.11 | C7.1 26.69,26.92 26.04,26.92
  Bottom 0.15: J4.SH1 J4.SH3 5.45,26.27 5.58,26.15 5.58,19.85 5.45,19.73 J4.SH4 J4.SH2 | v25.65,27.3 v25.65,24.64 26.8,23.5 v26.8,22.48 27.18,22.86 31.11,22.86 | v10.03,12.19 8.13,12.19 v7.87,12.45 | v10.96,13.97 12.45,13.97 v12.95,13.46
  Bottom 0.152: v30.1,13.46 29.58,12.95 v24.77,12.95 24.77,10.29 | 24.77,10.29 24.77,8 v24.64,7.87 | v16.82,41.02 17.4,41.02 v17.78,41.4 27.94,41.4 29.84,39.5 v29.84,33.15 | v10.16,26.42 v10.16,28.19 | v13.84,29.97 14.86,30.99 14.99,30.99 v15.04,31.04 | v33.15,29.34 33.15,27.36 31.45,25.66 31.45,25.61 v31.11,25.27 31.11,22.86 31.11,20.9 31.69,20.33 32,20.33 32.77,19.56 v32.77,15.37 | v7.75,20.7 7.75,18.92 v7.62,18.8 | v20.45,9.78 20.95,10.29 24.77,10.29 | v2.54,32.77 2.54,35.43 v2.03,35.94 2.03,37.85 v4.45,40.26
IMU_INT1  (via drill 0.3)
  Top 0.152: v6.99,32.51 6.99,34.92 7.62,35.56 8.38,35.56 8.55,35.4 U$1.P$N1 | IC4.5 6.35,30.23 7.71,31.59 v8.42,31.59
  Bottom 0.152: v8.42,31.59 7.49,32.51 v6.99,32.51
IMU_INT2
  Top 0.152: U$1.P$P2 8.16,35.15 7.49,34.48 7.49,32.87 7.54,32.82 7.54,32.42 IC4.6
LX1  (via drill 0.35)
  Top 0.152: IC1.B2 IC1.B3 12.94,26.91 12.97,26.91 13.16,27.09 13.16,27.13 v13.72,27.69 | L1.1 15.89,27.69 v14.73,27.69
  Bottom 0.152: v13.72,27.69 v14.73,27.69
LX2  (via drill 0.35)
  Top 0.152: IC1.D2 IC1.D3 12.94,26.11 12.94,25.97 13.16,25.75 13.16,24.94 v13.21,24.89 | L1.2 16.14,25.15 v14.73,25.15
  Bottom 0.152: v14.73,25.15 14.48,24.89 v13.21,24.89
N$1
  Top 0.152: U$1.P$D2 9.3,37.59 8.26,37.59 7.62,38.23 U$11.2 6.96,38.68 U$6.2
N$2
  Top 0.152: U$5.2 4.45,39.09 4.45,38.23 U$11.1 5.49,37.2 7.52,37.2 8.53,37.2 8.59,37.15 U$1.P$F2
N$3
  Top 0.15: U$1.P$H23 14.96,36.65 14.99,36.62 15.45,36.62 15.49,36.58 16.64,36.58 17.14,37.08 | U$12.1 17.65,38.35
  Top 0.152: 17.65,38.35 U$13.1 17.14,37.08
N$4
  Top 0.15: U$19.1 9.61,39.16 U$1.P$B3
N$5  (via drill 0.3)
  Top 0.15: U$26.1 U$20.2 9.57,40.85 9.82,40.85 10.29,40.39 U$8.2 10.11,39.19 U$1.P$B5
  Top 0.152: v10.79,41.66 U$26.1 | U$1.P$E24 15.44,37.48 v16.05,37.48
  Bottom 0.152: v10.79,41.66 14.42,38.04 15.48,38.04 v16.05,37.48
N$6
  Top 0.152: IC1.E1 11.85,25.42 R6.1
N$7
  Top 0.152: U$18.2 15.06,37.7 14.91,37.7 U$1.P$D23
N$8
  Top 0.152: U$1.P$A23 15.46,39.5 15.46,41.21 U$15.3 15.81,40.57 U$16.1
N$9
  Top 0.152: U$1.P$B24 16.75,39.79 16.75,39.92 17.25,40.42 17.25,41.93 16.89,42.29 U$17.1 16.8,43.11 16.29,43.62 15.34,43.62 14.74,43.02 U$15.1
N$10
  Top 0.15: U$20.1 U$19.2
N$11
  Top 0.15: U$12.2 U$21.1 19.81,40.81 ANT1.1
N$12
  Top 0.152: U$27.1 10.03,32.25 10.08,32.3 10.08,32.87 U$1.P$AC5
N$14
  Top 0.152: IC1.D1 11.96,25.93 11.92,25.93 11.74,25.75 10.92,25.75 10.67,25.5 R5.1
N$15
  Top 0.152: IC4.1 3.96,29.34 R9.1
N$17
  Top 0.152: EPD_C2.2 13.25,11.4 J3.4
N$18
  Top 0.152: IC3.D1 4.55,35.11 4.55,35.14 3.26,36.43 R4.2
N$19
  Top 0.152: EPD_C1.2 13.75,11.22 J3.5
N$20
  Top 0.152: EPD_C7.2 19.49,11.38 20.17,11.38 20.53,11.03 20.53,10.85 J3.19
N$21
  Top 0.152: C7.2 IC2.A2
N$22
  Top 0.152: J3.18 20.03,10.85 20.03,11.03 19.95,11.1 19.04,11.1 18.2,11.95 EPD_C6.2
N$23
  Top 0.152: EPD_C8.2 20.23,11.66 20.39,11.66 21.25,10.8 J3.20
N$25
  Top 0.152: EPD_C12.2 23.25,11.19 J3.24
N$26
  Top 0.152: D4.1 4.57,10.26 D2.2 5.6,10.79 U$37.1
N$27
  Top 0.152: J3.22 22.25,11.67 EPD_C10.2
N$28
  Top 0.15: J4.A5 6.49,24.25 R14.2
N$29
  Top 0.152: J4.B5 R13.1 | J4.B5
N$30  (via drill 0.3)
  Top 0.15: L2.1 25.07,7.93 25.07,8.05 24.52,8.6 23.84,8.6 23.49,8.26 13.34,8.26 v11.94,9.65 | v10.16,9.65 10.03,9.53 9.31,9.53
  Top 0.152: D3.2 8.26,7.88 U$37.2 9.31,8.94 9.31,9.53 9.31,11.25 8.89,11.67 Q2.3
  Bottom 0.15: v11.94,9.65 v10.16,9.65
N$31
  Top 0.15: R10.1 R11.2
  Top 0.152: R11.2 3.66,13.61 SJ1.2
OUT+
  Top 0.152: IC2.A3 26.73,25.73 29,25.73 TP_OP.TP
OUT-
  Top 0.152: TP_ON.TP 24.77,25.54 IC2.C3
P0.13/1.5D
  Top 0.152: R1.1 34.34,29.48 34.42,29.56 34.42,30.99 34.16,31.25 31.96,31.25 31.73,31.48 31.73,31.82 SW1.2 31.04,32.03 C11.2
P0.14/1.5D  (via drill 0.3)
  Top 0.152: 31.73,14.5 31.73,11.36 SW2.2 | C10.2 31.66,14.5 31.73,14.5 | R2.1 33.25,27.5 v33.58,27.18 | 31.73,14.5 v32.17,14.94
  Bottom 0.152: v33.58,27.18 33.36,27.18 31.73,25.55 31.73,20.68 31.8,20.61 32.11,20.61 32.47,20.25 33.35,20.25 34.67,18.92 34.67,16.17 33.44,14.94 v32.17,14.94
P1.01/1.6C
  Top 0.152: R_PWR_EPD.1 Q1.1
P1.02/1.6C
  Top 0.152: R3.1 34.29,26.67 33.37,25.75 31.94,25.75 31.73,25.55 31.73,22.41 SW3.2 30.46,22.29 30.29,22.29 30.04,22.54 C9.2
PMIC_INT  (via drill 0.3)
  Top 0.15: U$1.P$T2 8.26,34.65 7.92,34.31 v7.92,34.26 | IC3.A1 4.68,33.78 4.98,33.78 v5.09,33.67
  Bottom 0.15: v7.92,34.26 7.87,34.26 7.39,33.78 5.21,33.78 v5.09,33.67
PREVGH  (via drill 0.3)
  Top 0.15: D3.1 8.35,3.81 10.25,3.81 v10.25,7.75 | v21.72,9.65 21.72,10.59 J3.21
  Top 0.152: EPD_C9.2 21.75,11.15 J3.21
  Bottom 0.15: v10.25,7.75 21.59,7.75 21.72,7.87 v21.72,9.65
PREVGL  (via drill 0.3)
  Top 0.15: D4.2 5.69,4.83 v9.4,4.83 | v20.83,9.14 21.97,9.14 22.75,9.92 J3.23
  Top 0.152: EPD_C11.2 22.75,11.71 J3.23
  Bottom 0.15: v9.4,4.83 9.4,7.62 10.92,9.14 v20.83,9.14
RESE  (via drill 0.3)
  Top 0.15: R10.2 7.59,14.63 Q2.2 8.59,15.27 9.24,14.62 9.51,14.62 v10.16,13.97 | J3.3 12.75,11.13 12.24,11.64 v12.24,11.68
  Bottom 0.15: v10.16,13.97 12.19,11.94 12.19,11.73 v12.24,11.68
RESET  (via drill 0.3)
  Top 0.152: U$1.P$AC13 11.83,32.62 11.76,32.62 11.58,32.44 11.58,32.3 11.43,32.15 11.43,31.62 v12.06,30.99 | v16.2,34.85 16.41,34.85 18.31,36.75 22.04,36.75 22.91,35.88 J1.6 23.32,36.39 23.75,36.82 23.75,41.53 TP_RESET.TP
  Bottom 0.152: v12.06,30.99 15.75,34.67 16.02,34.67 v16.2,34.85
SASSS
  Top 0.152: U$1.P$C1 7.59,39.16 7.59,39.18 7.13,39.64 U$2.2
SCL/1.4C  (via drill 0.3)
  Top 0.152: U1.7 26.02,22.59 v26.04,22.61 | v24.64,27.18 24.89,27.18 IC2.C1
  Bottom 0.152: v26.04,22.61 24.64,24 v24.64,27.18
SCL/2.4C  (via drill 0.3)
  Top 0.15: 5.38,34.92 5.38,36.15 6.16,36.92 7.24,36.92 | TP_SCL.TP 9.14,24.63 9.14,25.53
  Top 0.152: IC3.B1 4.74,34.31 4.77,34.31 4.91,34.46 | 4.91,34.46 5.38,34.92 | R8.2 10.7,24.83 R5.2 10,25.53 9.14,25.53 8.28,25.53 7.12,26.69 7.12,27.46 v7.06,27.51 | 4.91,34.46 5.84,33.53 v5.84,32 | IC4.12 3.99,30.23 v3.35,30.86 | U$1.P$M2 9.36,35.83 9.08,36.1 9.08,36.49 8.95,36.62 8.72,36.62 8.41,36.92 7.63,36.92 7.24,36.92
  Bottom 0.152: v5.84,32 4.7,30.86 | v3.35,30.86 4.7,30.86 | 4.7,30.86 6.52,29.04 6.52,28.27 7.06,27.72 v7.06,27.51
SDA/1.4C
  Top 0.152: IC2.B2 26.29,25.78 26.29,23.47 25.61,22.78 25.61,21.52 U1.8
SDA/2.4C  (via drill 0.3, 0.35)
  Top 0.15: U$1.P$L1 8.55,35.9 8.26,36.2 6.35,36.2 v5.84,35.69
  Top 0.152: R6.2 v11.18,24.26 R7.2 | IC3.C1 4.95,34.92 4.95,36.32 v4.45,36.32 | v5.84,35.69 6.48,35.05 v6.48,32 | v6.8,30.07 5.97,29.24 5.97,28.96 5.81,28.96 5.51,28.65 5.16,28.65 4.91,28.91 4.91,29.63 IC4.2 | v10.03,24.26 10.03,21.68 TP_SDA.TP
  Bottom 0.152: v11.18,24.26 v10.03,24.26 10.03,25.15 6.8,28.38 v6.8,30.07 6.48,30.39 v6.48,32 | v4.45,36.32 5.21,36.32 v5.84,35.69
SWDCLK
  Top 0.152: J1.4 22.91,34.61 22.04,33.75 17.78,33.75 | U$1.P$AA24 15.71,33.75 17.78,33.75 | TP_SWDCLK.TP 18.99,34.96 17.78,33.75
SWDIO
  Top 0.152: 22.4,30.94 22.92,31.45 22.92,32.94 J1.2 | 22.4,30.94 22.04,30.57 20.8,30.57 18.47,32.9 U$1.P$AC24 | TP_SWDIO.TP 22.4,30.94
SWO  (via drill 0.3)
  Top 0.152: U$1.P$AD22 14.22,32.27 v14.22,31.88 | v13.97,30.86 15.62,29.21 TP_SWO.TP
  Bottom 0.152: v14.22,31.88 14.22,31.11 v13.97,30.86
VBAT/1.2A
  Top 0.15: TP_VBAT.TP 25.53,18.29 C2.2
  Top 0.152: U1.2 U1.3 26.52,18.39 C2.2
VBAT/2.5C
  Top 0.152: C5.2 2.64,34.84 2.71,34.84 2.93,34.62 IC3.C2
VBUS/1.5D
  Top 0.15: J4.A4_B9 5.34,25.4 5.21,25.27 4.69,25.27 4.56,25.4 2.54,25.4 2.29,25.15 2.29,21.21 2.54,20.95 5.38,20.95 5.4,20.98 5.65,20.98 J4.A9_B4 6.72,20.6 8.51,18.81 10.16,18.81 10.65,18.81 11.14,18.81 D1.5
  Top 0.152: D1.5 C1.1 12.96,18.1 U$34.1
VBUS/2.6D  (via drill 0.3)
  Top 0.152: C4.2 3.57,33.82 IC3.A2 4.32,33.74 v4.32,32.64 | U$23.1 9.36,31.07 U$1.P$AD2 9.34,32.38 v8.51,32.38
  Bottom 0.152: v8.51,32.38 8.26,32.64 7.76,32.64 7.46,32.94 6.81,32.94 6.5,32.64 v4.32,32.64
VREG
  Top 0.152: IC3.B2 2.6,34.22 C39.1 2.31,34.32 C6.2 1.04,32.51 1.04,29.41 2.42,28.03 8.98,28.03 8.89,27.94 | IC1.A3 IC1.A2 IC1.A1 11.84,27.42 U$28.2 10.14,27.42 9.62,27.94 8.89,27.94 | TP_VREG.TP 8.64,27.69 8.89,27.94